# Altium PCB PcbDoc.pcbdoc
Units mil, origin at the board's own origin, x right, y up, seen from the top; angles counter-clockwise.
Board outline 5010.35 x 5043.03 mil, 2 copper layers (Top Layer, Bottom Layer); 34 components, 69 nets, 194 pads, 39 vias.
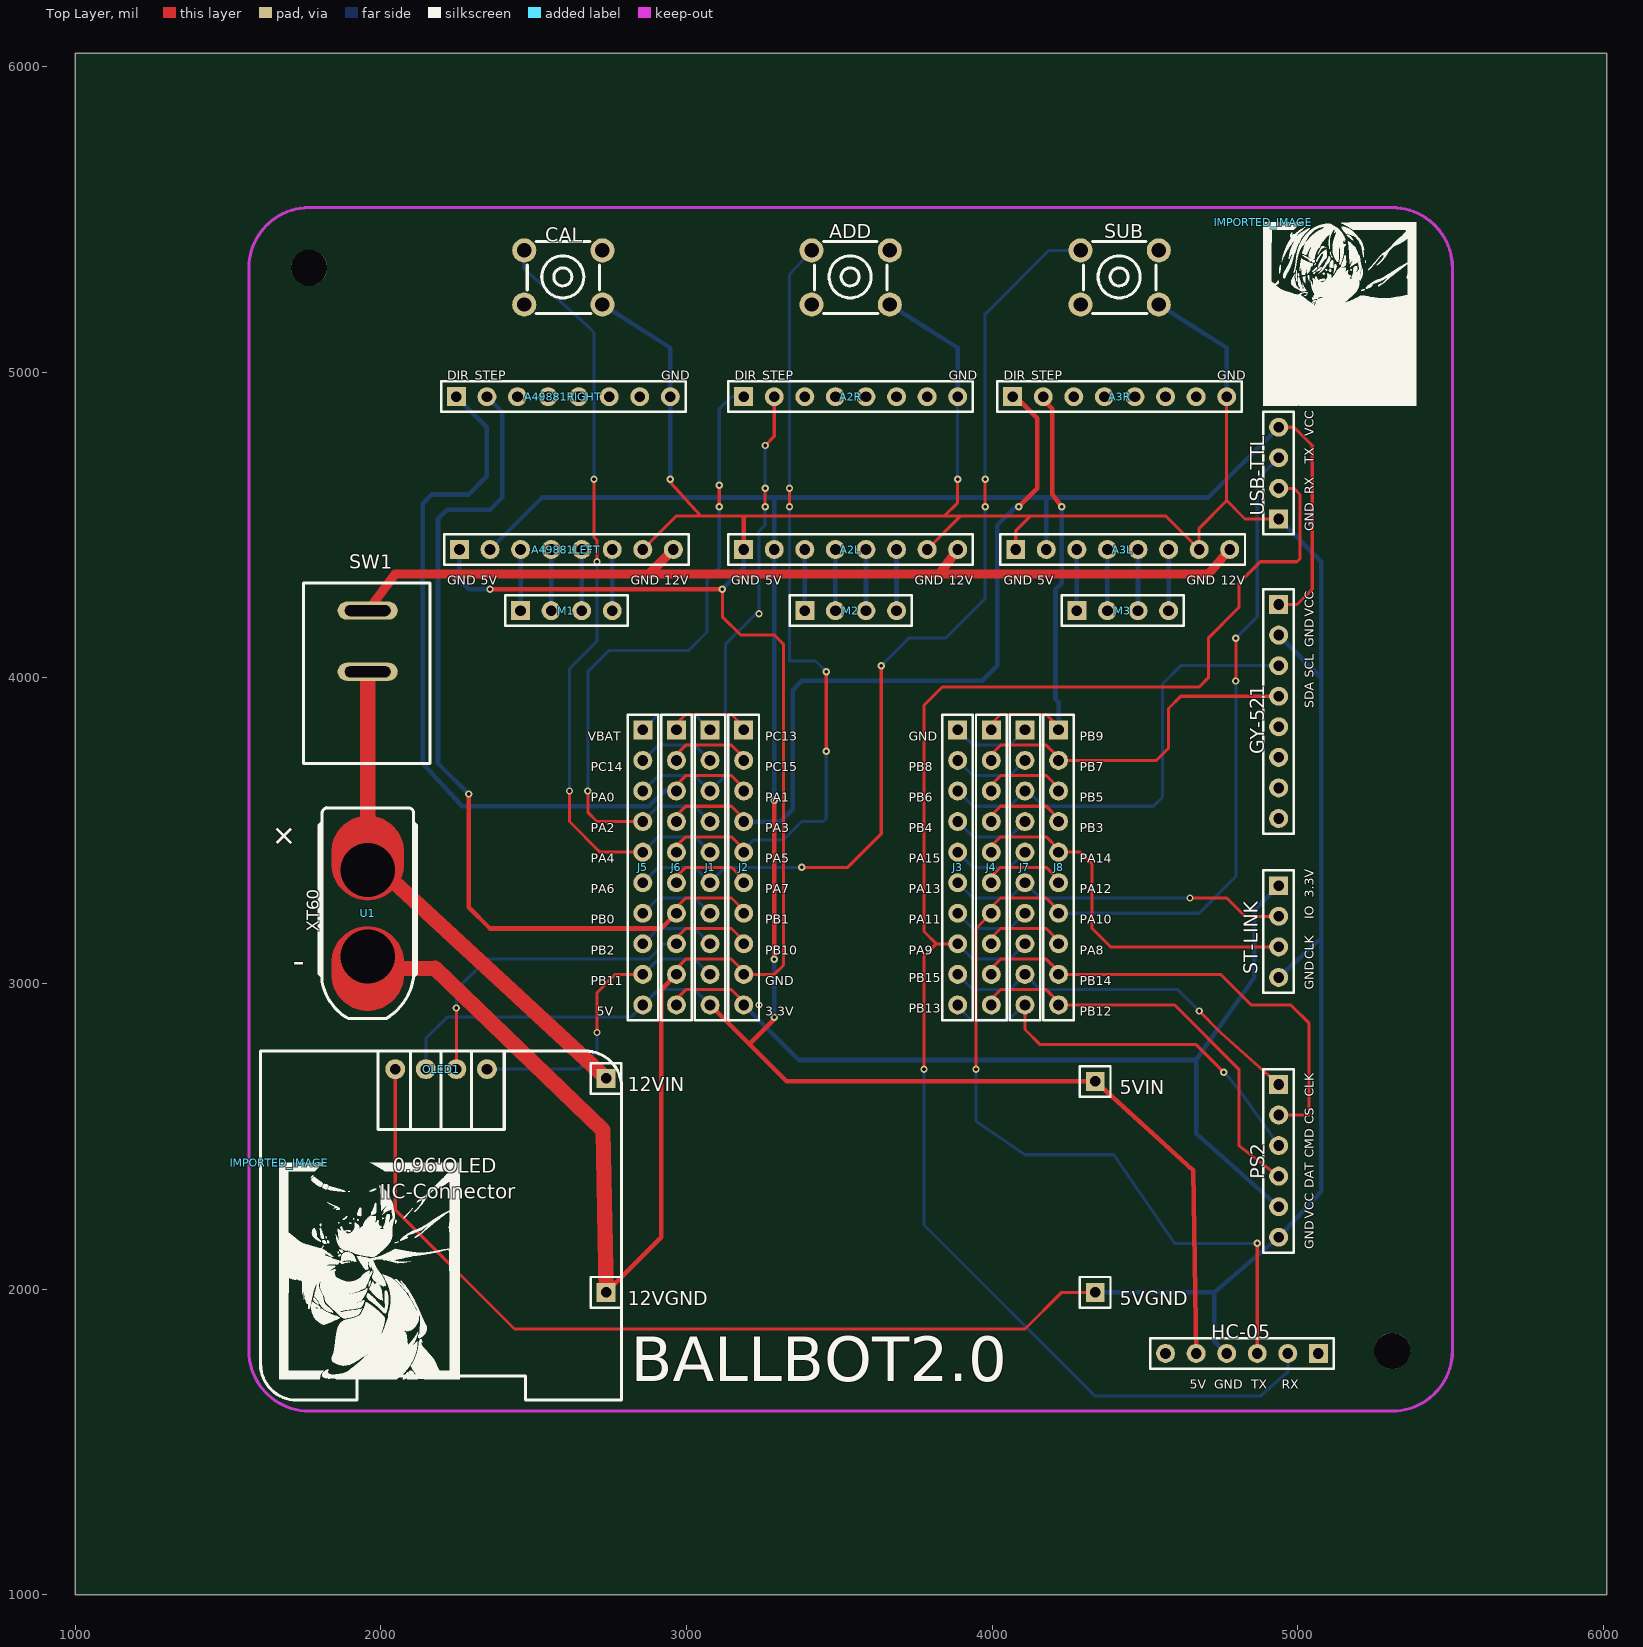
[diagram p0: Top Layer view]
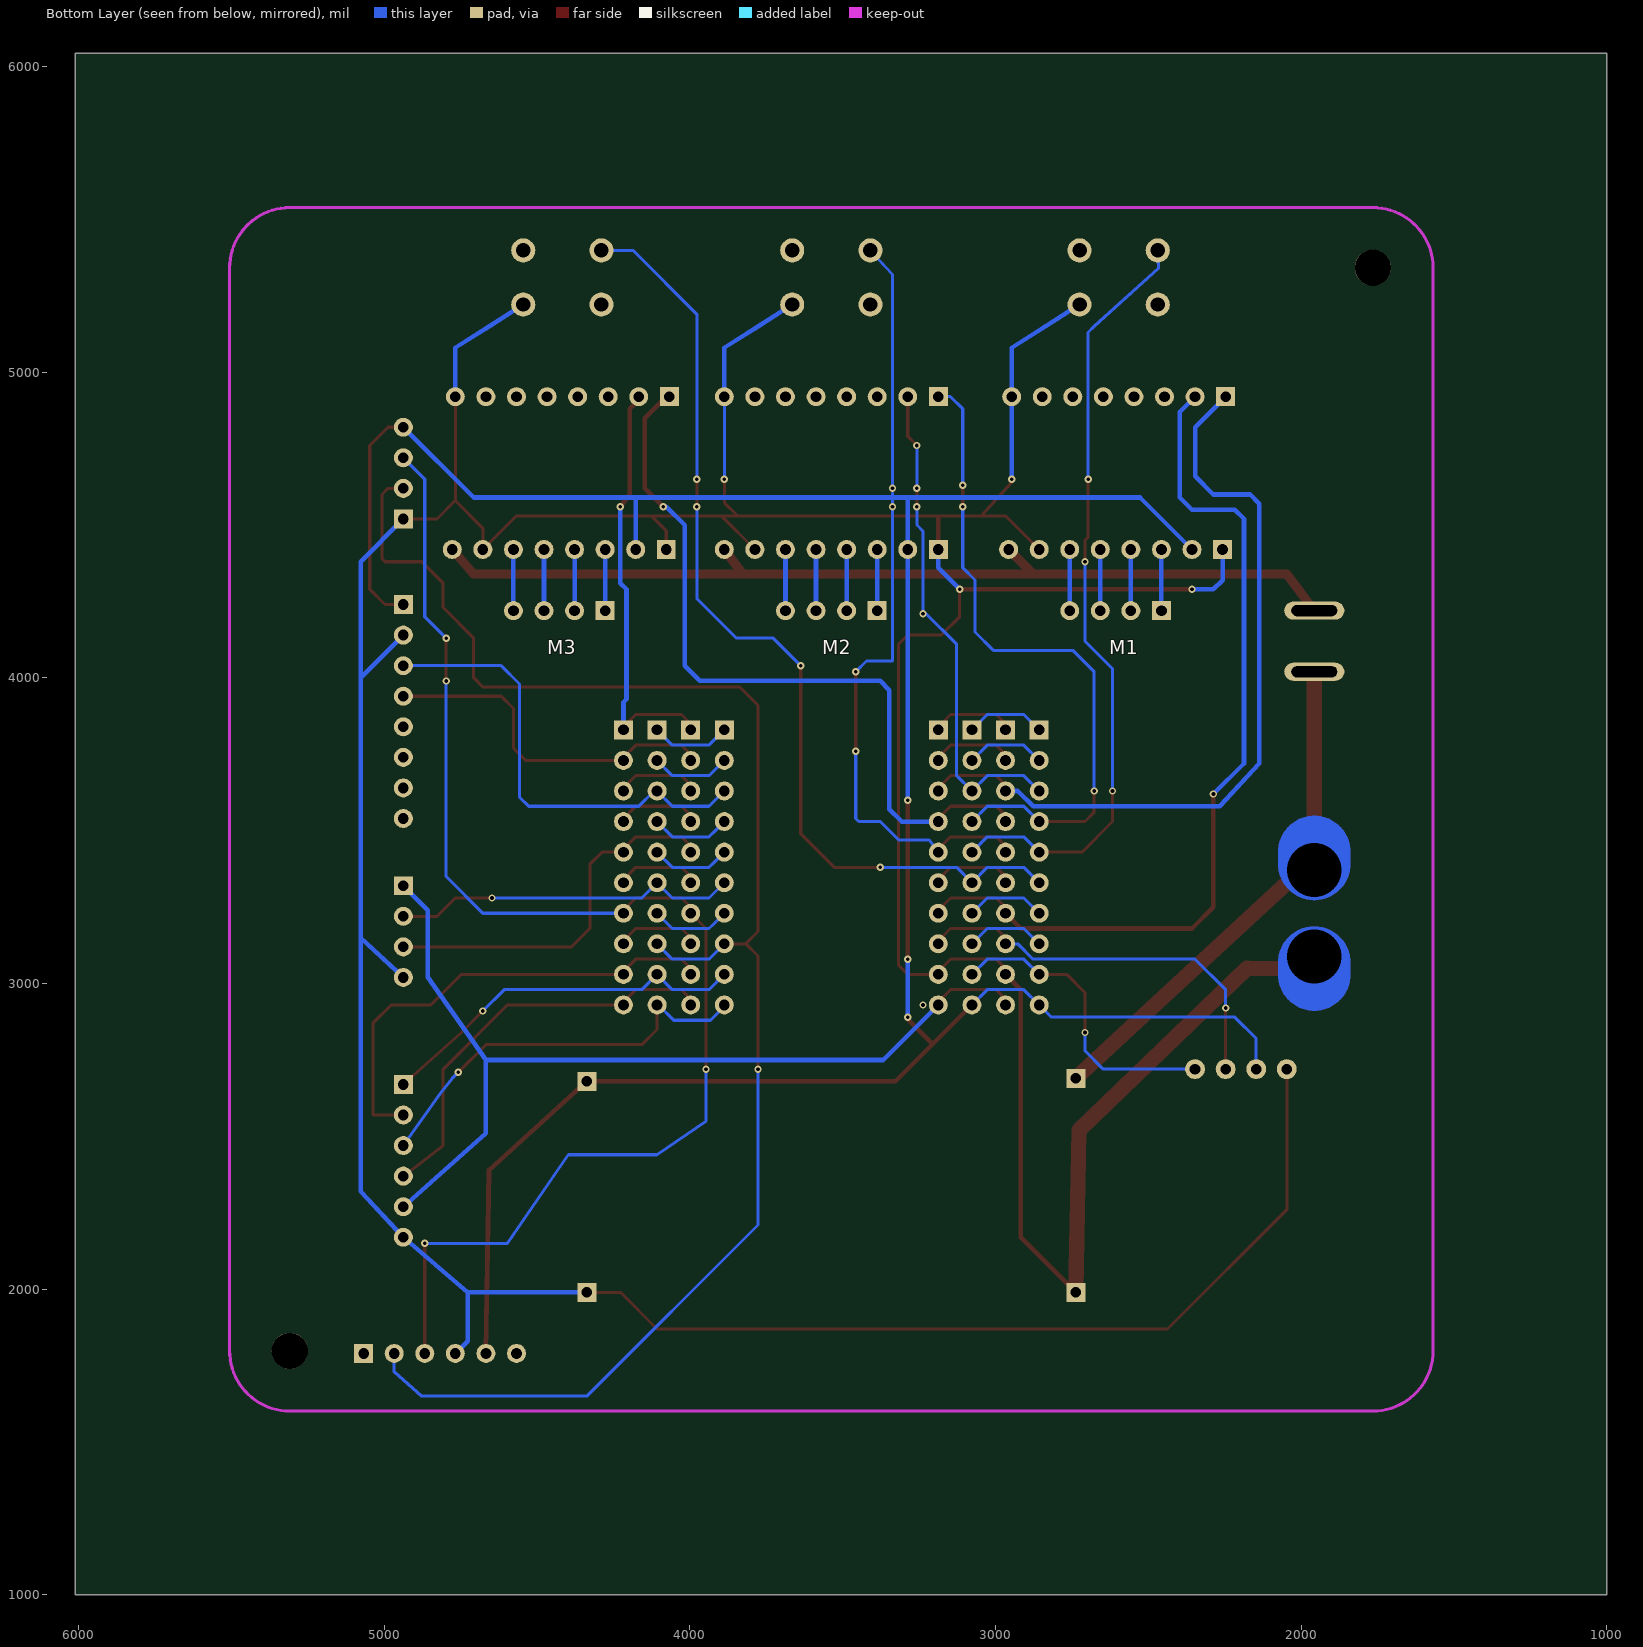
[diagram p1: Bottom Layer view, seen from below]

## Layer stack, top to bottom
Top Layer: signal copper (thickness not stored)
Dielectric: dielectric 12.6, FR-4, Dk 4.8
Bottom Layer: signal copper (thickness not stored)

## Board outline
6010.35,1000 1000,1000 1000,6043.03 6010.35,6043.03

## Components (designator, comment, footprint, x,y, rotation, side; value= is the part's Value field where it differs from the comment)
5VGND "HDR-M-2.54_1x1" HDR-M-2.54_1X1 4336.85,1989.53 r0 top
5VIN "HDR-M-2.54_1x1" HDR-M-2.54_1X1 4336.85,2679.53 r0 top
12VGND "HDR-M-2.54_1x1" HDR-M-2.54_1X1 2736.85,1989.53 r0 top
12VIN "HDR-M-2.54_1x1" HDR-M-2.54_1X1 2736.85,2689.53 r0 top
A2L "HDR-M-2.54_1x8" HDR-M-2.54_1X8 3586.85,4419.53 r0 top
A2R "HDR-M-2.54_1x8" HDR-M-2.54_1X8 3586.85,4919.53 r0 top
A3L "HDR-M-2.54_1x8" HDR-M-2.54_1X8 4476.85,4419.53 r0 top
A3R "HDR-M-2.54_1x8" HDR-M-2.54_1X8 4466.85,4919.53 r0 top
A49881LEFT "HDR-M-2.54_1x8" HDR-M-2.54_1X8 2656.85,4419.53 r0 top
A49881RIGHT "HDR-M-2.54_1x8" HDR-M-2.54_1X8 2646.85,4919.53 r0 top
ADD "KEY-6*6*9.5" KEY-TH_4P-L6.0-W6.0-P4.50-LS7.5 3536.85,5309.53 r0 top
CAL "KEY-6*6*9.5" KEY-TH_4P-L6.0-W6.0-P4.50-LS7.5 2596.85,5309.53 r0 top
GY-521 "HDR-M-2.54_1x8" HDR-M-2.54_1X8 4936.85,3839.53 r270 top
HC-05 "HDR-M-2.54_1x6" HDR-M-2.54_1X6 4816.85,1789.53 r180 top
IMPORTED_IMAGE "IMPORTED_IMAGE" IMPORTED_IMAGE 4886.85,5489.53 r0 top
IMPORTED_IMAGE "IMPORTED_IMAGE" IMPORTED_IMAGE 1666.85,2413.86 r0 top
J1 "HDR-M-2.54_1x10" HDR-M-2.54_1X10 3076.85,3379.53 r270 top
J2 "HDR-M-2.54_1x10" HDR-M-2.54_1X10 3186.85,3379.53 r270 top
J3 "HDR-M-2.54_1x10" HDR-M-2.54_1X10 3886.85,3379.53 r270 top
J4 "HDR-M-2.54_1x10" HDR-M-2.54_1X10 3996.85,3379.53 r270 top
J5 "HDR-M-2.54_1x10" HDR-M-2.54_1X10 2856.85,3379.53 r270 top
J6 "HDR-M-2.54_1x10" HDR-M-2.54_1X10 2966.85,3379.53 r270 top
J7 "HDR-M-2.54_1x10" HDR-M-2.54_1X10 4106.85,3379.53 r270 top
J8 "HDR-M-2.54_1x10" HDR-M-2.54_1X10 4216.85,3379.53 r270 top
M1 "HDR-M-2.54_1x4" HDR-M-2.54_1X4 2606.85,4219.53 r0 top
M2 "HDR-M-2.54_1x4" HDR-M-2.54_1X4 3536.85,4219.53 r0 top
M3 "HDR-M-2.54_1x4" HDR-M-2.54_1X4 4426.85,4219.53 r0 top
OLED1 "0.96OLED_4P" 0.96OLED_4P 2196.85,2719.53 r0 top
PS2 "HDR-M-2.54_1x6" HDR-M-2.54_1X6 4936.85,2419.53 r270 top
ST-LINK "HDR-M-2.54_1x4" HDR-M-2.54_1X4 4936.85,3169.53 r270 top
SUB "KEY-6*6*9.5" KEY-TH_4P-L6.0-W6.0-P4.50-LS7.5 4416.85,5309.53 r0 top
SW1 "小型 船型/形开关 KCD11 2档2脚 2档3脚 15*10mm 翘板开关" "小型 船型/形开关 KCD11 2档2脚 2档3脚 15*10MM 翘板开关" 1956.85,4219.53 r0 top
U1 "XT60" XT60 1956.85,3229.53 r270 top
USB-TTL "HDR-M-2.54_1x4" HDR-M-2.54_1X4 4936.85,4669.53 r90 top

## Footprints (in the part's own frame and the unit in brackets; to place one, negate y for a bottom-side part, rotate by r counter-clockwise, add the part's x,y. Pads: shape width x height; smd on the part's side, far side on the other; paste and mask are expansions set on the pad)
0.96OLED_4P [mm]
  round 1.65 hole 0.89: 1(-3.81,-0.001) 2(-1.27,0.002) 3(1.27,0.002) 4(3.81,0.002)
  silkscreen extent -15,-27.5 15,1.5
HDR-M-2.54_1X1 [mil]
  rect 62x62 hole 35: 1(0,0)
  silkscreen extent -50,-50 50,50
HDR-M-2.54_1X4 [mil]
  rect 62x62 hole 35: 1(-150,0)
  round 62 hole 35: 2(-50,0) 3(50,0) 4(150,0)
  silkscreen extent -200,-50 200,50
HDR-M-2.54_1X6 [mil]
  rect 62x62 hole 35: 1(-250,0)
  round 62 hole 35: 2(-150,0) 3(-50,0) 4(50,0) 5(150,0) 6(250,0)
  silkscreen extent -300,-50 300,50
HDR-M-2.54_1X8 [mil]
  rect 62x62 hole 35: 1(-400,0)
  round 62 hole 35: 2(-300,0) 3(-200,0) 4(-100,0) 5(0,0) 6(100,0) 7(200,0) 8(300,0)
  silkscreen extent -450,-50 350,50
HDR-M-2.54_1X10 [mil]
  rect 62x62 hole 35: 1(-450,0)
  round 62 hole 35: 2(-350,0) 3(-250,0) 4(-150,0) 5(-50,0) 6(50,0) 7(150,0) 8(250,0) 9(350,0) 10(450,0)
  silkscreen extent -500,-50 500,50
IMPORTED_IMAGE [mil]
  silkscreen extent 0,-600 500,0
KEY-TH_4P-L6.0-W6.0-P4.50-LS7.5 [mm]
  round 2 hole 1.2: 1(-3.25,-2.25) 2(3.25,-2.25) 3(3.25,2.25) 4(-3.25,2.25)
  silkscreen extent -3,-3 3,3
XT60 [mm]
  round 0 hole 4.5: 1(-3.6,0) 2(3.6,0)
  Top Layer region: -1.101,-0.075 -1.108,-0.224 -1.123,-0.373 -1.146,-0.521 -1.175,-0.668 -1.212,-0.813 -1.256,-0.955 -1.307,-1.096 -1.366,-1.234 -1.43,-1.369 -1.502,-1.5 -1.58,-1.628 -1.664,-1.751 -1.755,-1.87 -1.851,-1.985 -1.952,-2.095 -2.06,-2.199 -2.172,-2.298 -2.289,-2.391 -2.41,-2.479 -2.536,-2.56 -2.665,-2.635 -2.798,-2.703 -2.935,-2.764 -3.074,-2.819 -3.216,-2.867 -3.36,-2.907 -3.506,-2.941 -3.653,-2.966 -3.801,-2.985 -3.951,-2.996 -4.1,-3 -5.1,-3 -5.25,-2.996 -5.399,-2.985 -5.547,-2.966 -5.695,-2.941 -5.84,-2.907 -5.984,-2.867 -6.126,-2.819 -6.265,-2.764 -6.402,-2.703 -6.535,-2.635 -6.664,-2.56 -6.79,-2.479 -6.911,-2.391 -7.028,-2.298 -7.141,-2.199 -7.248,-2.095 -7.349,-1.985 -7.446,-1.87 -7.536,-1.751 -7.62,-1.628 -7.698,-1.5 -7.77,-1.369 -7.835,-1.234 -7.893,-1.096 -7.944,-0.955 -7.988,-0.813 -8.025,-0.668 -8.054,-0.521 -8.077,-0.373 -8.092,-0.224 -8.099,-0.075 -8.099,0.075 -8.092,0.224 -8.077,0.373 -8.054,0.521 -8.025,0.668 -7.988,0.813 -7.944,0.955 -7.893,1.096 -7.835,1.234 -7.77,1.369 -7.698,1.5 -7.62,1.628 -7.536,1.751 -7.446,1.87 -7.349,1.985 -7.248,2.095 -7.141,2.199 -7.028,2.298 -6.911,2.391 -6.79,2.479 -6.664,2.56 -6.535,2.635 -6.402,2.703 -6.265,2.764 -6.126,2.819 -5.984,2.867 -5.84,2.907 -5.695,2.941 -5.547,2.966 -5.399,2.985 -5.25,2.996 -5.1,3 -4.1,3 -3.951,2.996 -3.801,2.985 -3.653,2.966 -3.506,2.941 -3.36,2.907 -3.216,2.867 -3.074,2.819 -2.935,2.764 -2.798,2.703 -2.665,2.635 -2.536,2.56 -2.41,2.479 -2.289,2.391 -2.172,2.298 -2.06,2.199 -1.952,2.095 -1.851,1.985 -1.755,1.87 -1.664,1.751 -1.58,1.628 -1.502,1.5 -1.43,1.369 -1.366,1.234 -1.307,1.096 -1.256,0.955 -1.212,0.813 -1.175,0.668 -1.146,0.521 -1.123,0.373 -1.108,0.224 -1.101,0.075
  Top Layer region: 8.099,-0.075 8.092,-0.224 8.077,-0.373 8.054,-0.521 8.025,-0.668 7.988,-0.813 7.944,-0.955 7.893,-1.096 7.834,-1.234 7.77,-1.369 7.698,-1.5 7.62,-1.628 7.536,-1.751 7.445,-1.87 7.349,-1.985 7.248,-2.095 7.14,-2.199 7.028,-2.298 6.911,-2.391 6.79,-2.479 6.664,-2.56 6.535,-2.635 6.402,-2.703 6.265,-2.764 6.126,-2.819 5.984,-2.867 5.84,-2.907 5.694,-2.941 5.547,-2.966 5.399,-2.985 5.249,-2.996 5.1,-3 4.1,-3 3.95,-2.996 3.801,-2.985 3.653,-2.966 3.506,-2.941 3.36,-2.907 3.216,-2.867 3.074,-2.819 2.935,-2.764 2.798,-2.703 2.665,-2.635 2.536,-2.56 2.41,-2.479 2.289,-2.391 2.172,-2.298 2.059,-2.199 1.952,-2.095 1.851,-1.985 1.754,-1.87 1.664,-1.751 1.58,-1.628 1.502,-1.5 1.43,-1.369 1.365,-1.234 1.307,-1.096 1.256,-0.955 1.212,-0.813 1.175,-0.668 1.146,-0.521 1.123,-0.373 1.108,-0.224 1.101,-0.075 1.101,0.075 1.108,0.224 1.123,0.373 1.146,0.521 1.175,0.668 1.212,0.813 1.256,0.955 1.307,1.096 1.365,1.234 1.43,1.369 1.502,1.5 1.58,1.628 1.664,1.751 1.754,1.87 1.851,1.985 1.952,2.095 2.059,2.199 2.172,2.298 2.289,2.391 2.41,2.479 2.536,2.56 2.665,2.635 2.798,2.703 2.935,2.764 3.074,2.819 3.216,2.867 3.36,2.907 3.506,2.941 3.653,2.966 3.801,2.985 3.95,2.996 4.1,3 5.1,3 5.249,2.996 5.399,2.985 5.547,2.966 5.694,2.941 5.84,2.907 5.984,2.867 6.126,2.819 6.265,2.764 6.402,2.703 6.535,2.635 6.664,2.56 6.79,2.479 6.911,2.391 7.028,2.298 7.14,2.199 7.248,2.095 7.349,1.985 7.445,1.87 7.536,1.751 7.62,1.628 7.698,1.5 7.77,1.369 7.834,1.234 7.893,1.096 7.944,0.955 7.988,0.813 8.025,0.668 8.054,0.521 8.077,0.373 8.092,0.224 8.099,0.075
  Bottom Layer region: -1.101,-0.075 -1.108,-0.224 -1.123,-0.373 -1.146,-0.521 -1.175,-0.668 -1.212,-0.813 -1.256,-0.955 -1.307,-1.096 -1.366,-1.234 -1.43,-1.369 -1.502,-1.5 -1.58,-1.628 -1.664,-1.751 -1.755,-1.87 -1.851,-1.985 -1.952,-2.095 -2.06,-2.199 -2.172,-2.298 -2.289,-2.391 -2.41,-2.479 -2.536,-2.56 -2.665,-2.635 -2.798,-2.703 -2.935,-2.764 -3.074,-2.819 -3.216,-2.867 -3.36,-2.907 -3.506,-2.941 -3.653,-2.966 -3.801,-2.985 -3.951,-2.996 -4.1,-3 -5.1,-3 -5.25,-2.996 -5.399,-2.985 -5.547,-2.966 -5.695,-2.941 -5.84,-2.907 -5.984,-2.867 -6.126,-2.819 -6.265,-2.764 -6.402,-2.703 -6.535,-2.635 -6.664,-2.56 -6.79,-2.479 -6.911,-2.391 -7.028,-2.298 -7.141,-2.199 -7.248,-2.095 -7.349,-1.985 -7.446,-1.87 -7.536,-1.751 -7.62,-1.628 -7.698,-1.5 -7.77,-1.369 -7.835,-1.234 -7.893,-1.096 -7.944,-0.955 -7.988,-0.813 -8.025,-0.668 -8.054,-0.521 -8.077,-0.373 -8.092,-0.224 -8.099,-0.075 -8.099,0.075 -8.092,0.224 -8.077,0.373 -8.054,0.521 -8.025,0.668 -7.988,0.813 -7.944,0.955 -7.893,1.096 -7.835,1.234 -7.77,1.369 -7.698,1.5 -7.62,1.628 -7.536,1.751 -7.446,1.87 -7.349,1.985 -7.248,2.095 -7.141,2.199 -7.028,2.298 -6.911,2.391 -6.79,2.479 -6.664,2.56 -6.535,2.635 -6.402,2.703 -6.265,2.764 -6.126,2.819 -5.984,2.867 -5.84,2.907 -5.695,2.941 -5.547,2.966 -5.399,2.985 -5.25,2.996 -5.1,3 -4.1,3 -3.951,2.996 -3.801,2.985 -3.653,2.966 -3.506,2.941 -3.36,2.907 -3.216,2.867 -3.074,2.819 -2.935,2.764 -2.798,2.703 -2.665,2.635 -2.536,2.56 -2.41,2.479 -2.289,2.391 -2.172,2.298 -2.06,2.199 -1.952,2.095 -1.851,1.985 -1.755,1.87 -1.664,1.751 -1.58,1.628 -1.502,1.5 -1.43,1.369 -1.366,1.234 -1.307,1.096 -1.256,0.955 -1.212,0.813 -1.175,0.668 -1.146,0.521 -1.123,0.373 -1.108,0.224 -1.101,0.075
  Bottom Layer region: 8.099,-0.075 8.092,-0.224 8.077,-0.373 8.054,-0.521 8.025,-0.668 7.988,-0.813 7.944,-0.955 7.893,-1.096 7.834,-1.234 7.77,-1.369 7.698,-1.5 7.62,-1.628 7.536,-1.751 7.445,-1.87 7.349,-1.985 7.248,-2.095 7.14,-2.199 7.028,-2.298 6.911,-2.391 6.79,-2.479 6.664,-2.56 6.535,-2.635 6.402,-2.703 6.265,-2.764 6.126,-2.819 5.984,-2.867 5.84,-2.907 5.694,-2.941 5.547,-2.966 5.399,-2.985 5.249,-2.996 5.1,-3 4.1,-3 3.95,-2.996 3.801,-2.985 3.653,-2.966 3.506,-2.941 3.36,-2.907 3.216,-2.867 3.074,-2.819 2.935,-2.764 2.798,-2.703 2.665,-2.635 2.536,-2.56 2.41,-2.479 2.289,-2.391 2.172,-2.298 2.059,-2.199 1.952,-2.095 1.851,-1.985 1.754,-1.87 1.664,-1.751 1.58,-1.628 1.502,-1.5 1.43,-1.369 1.365,-1.234 1.307,-1.096 1.256,-0.955 1.212,-0.813 1.175,-0.668 1.146,-0.521 1.123,-0.373 1.108,-0.224 1.101,-0.075 1.101,0.075 1.108,0.224 1.123,0.373 1.146,0.521 1.175,0.668 1.212,0.813 1.256,0.955 1.307,1.096 1.365,1.234 1.43,1.369 1.502,1.5 1.58,1.628 1.664,1.751 1.754,1.87 1.851,1.985 1.952,2.095 2.059,2.199 2.172,2.298 2.289,2.391 2.41,2.479 2.536,2.56 2.665,2.635 2.798,2.703 2.935,2.764 3.074,2.819 3.216,2.867 3.36,2.907 3.506,2.941 3.653,2.966 3.801,2.985 3.95,2.996 4.1,3 5.1,3 5.249,2.996 5.399,2.985 5.547,2.966 5.694,2.941 5.84,2.907 5.984,2.867 6.126,2.819 6.265,2.764 6.402,2.703 6.535,2.635 6.664,2.56 6.79,2.479 6.911,2.391 7.028,2.298 7.14,2.199 7.248,2.095 7.349,1.985 7.445,1.87 7.536,1.751 7.62,1.628 7.698,1.5 7.77,1.369 7.834,1.234 7.893,1.096 7.944,0.955 7.988,0.813 8.025,0.668 8.054,0.521 8.077,0.373 8.092,0.224 8.099,0.075
  silkscreen extent -8.77,-4.06 8.76,4.06
"小型 船型/形开关 KCD11 2档2脚 2档3脚 15*10MM 翘板开关" [mm]
  oval 5x1.5 hole 0.9 slot 3.8 at 0 deg: 1(0,0) 2(0,-5.08)
  silkscreen extent -5.33,-12.71 5.17,2.29

## Free pads (board coordinates)
  round 118.11 hole 118.11 unplated: ""(1765.2,5341.18) ""(5308.5,1797.88)

## Via types
v1: diameter 24, hole 12, Top Layer to Bottom Layer, 39 vias

## Nets (pads, with @x,y where several pads share a name; then routed paths per layer and width w, separated by ;. In a path a pad name is that pad's centre, name@x,y a point inside that pad or via, vN(x,y) a via of type N, cw(c..) or ccw(c..) an arc to the next point about the centre after c; other vN are vias at no path point)
0: HC-05.6
5V:  | length 7098.2
  Top Layer w10: 4936.85,4239.53 4996.85,4239.53 5046.85,4289.53 5046.85,4759.53 4986.85,4819.53 4936.85,4819.53
  Top Layer w15: 3076.85,2929.53 3326.85,2679.53 4336.85,2679.53 ; 3204.92,2801.46 3286.85,2883.39 v1(3286.85,2889.53) ; v1(3286.85,3079.53) v1(3286.85,3599.53)
  Bottom Layer w10: 2856.85,2929.53 2906.85,2979.53 2967.28,2979.53 3026.85,2979.53 3076.85,2929.53
  Bottom Layer w15: 2356.85,4419.53 2526.85,4589.53 4706.85,4589.53 4936.85,4819.53 ; v1(3286.85,2889.53) v1(3286.85,3079.53) ; v1(3286.85,3599.53) 3286.85,4419.53 3286.85,4589.53 ; 4176.85,4419.53 4176.85,4589.53
+5V: 5VIN.1 A2L.2 A3L.2 A49881LEFT.2 GY-521.1 HC-05.5 J1.10 J5.10 OLED1.2 USB-TTL.4 | length 1887.5
  Top Layer w15: 5VIN.1 4656.85,2389.53 HC-05.5
  Bottom Layer w10: OLED1.2 2146.85,2819.53 2216.85,2889.53 2816.85,2889.53 J5.10
+12V: 12VIN.1 A2L.8 A3L.8 A49881LEFT.8 SW1.1 SW1.2 U1.1 | length 4800.6
  Top Layer w30: SW1.1 2046.85,4339.53 2876.85,4339.53 ; A49881LEFT.8 2876.85,4339.53 ; A2L.8 3826.85,4339.53 ; A3L.8 4706.85,4339.53 3826.85,4339.53 ; 2876.85,4339.53 3826.85,4339.53
  Top Layer w50: SW1.2 1956.85,3410.64 2448.81,2955.82 12VIN.1
A2L_3: A2L.3 M2.1 | length 200
  Bottom Layer w15: M2.1 A2L.3
A2L_4: A2L.4 M2.2 | length 200
  Bottom Layer w15: M2.2 A2L.4
A2L_5: A2L.5 M2.3 | length 200
  Bottom Layer w15: M2.3 A2L.5
A2L_6: A2L.6 M2.4 | length 200
  Bottom Layer w15: M2.4 A2L.6
A3L_3: A3L.3 M3.1 | length 200
  Bottom Layer w15: M3.1 A3L.3
A3L_4: A3L.4 M3.2 | length 200
  Bottom Layer w15: M3.2 A3L.4
A3L_5: A3L.5 M3.3 | length 200
  Bottom Layer w15: M3.3 A3L.5
A3L_6: A3L.6 M3.4 | length 200
  Bottom Layer w15: M3.4 A3L.6
A49881LEFT_3: A49881LEFT.3 M1.1 | length 200
  Bottom Layer w15: M1.1 A49881LEFT.3
A49881LEFT_4: A49881LEFT.4 M1.2 | length 200
  Bottom Layer w15: M1.2 A49881LEFT.4
A49881LEFT_5: A49881LEFT.5 M1.3 | length 200
  Bottom Layer w15: M1.3 A49881LEFT.5
A49881LEFT_6: A49881LEFT.6 M1.4 | length 200
  Bottom Layer w15: M1.4 A49881LEFT.6
DIR1: A49881RIGHT.1 J2.3 J6.3 | length 2583.6
  Top Layer w10: J6.3@2956.85,3639.53 2996.85,3679.53 3146.85,3679.53 3186.85,3639.53 J2.3
  Bottom Layer w15: A49881RIGHT.1 2346.85,4819.53 2346.85,4659.53 2286.85,4599.53 2166.85,4599.53 2136.85,4569.53 2136.85,3719.53 2266.85,3579.53 2876.85,3579.53 2926.85,3629.53 J6.3
DIR2: A2R.1 J1.4 J5.4 | length 2200.8
  Top Layer w10: v1(2676.85,3629.53) 2676.85,3559.53 2706.85,3529.53 J5.4 ; v1(3106.85,4559.53) v1(3106.85,4629.53)
  Bottom Layer w10: v1(2676.85,3629.53) 2676.85,4019.53 2746.85,4089.53 3006.85,4089.53 3066.85,4149.53 3066.85,4319.53 3106.85,4359.53 v1(3106.85,4559.53) ; J5.4 2906.85,3579.53 2960.18,3579.53 3026.85,3579.53 J1.4 ; v1(3106.85,4629.53) 3106.85,4879.53 3146.85,4919.53 A2R.1
DIR3: A3R.1 J2.4 J6.4 | length 2521.5
  Top Layer w10: J6.4@2956.85,3539.53 2996.85,3579.53 3146.85,3579.53 3186.85,3539.53 J2.4
  Top Layer w15: A3R.1 4076.85,4919.53 4146.85,4849.53 4146.85,4619.53 v1(4086.85,4559.53)
  Bottom Layer w15: J2.4 3306.85,3529.53 3346.85,3569.53 3346.85,3959.53 3376.85,3989.53 3966.85,3989.53 4016.85,4039.53 4016.85,4499.53 4076.85,4559.53 v1(4086.85,4559.53)
GND: 5VGND.1 12VGND.1 A2L.1 A2L.7 A2R.8 A3L.1 A3L.7 A3R.8 A49881LEFT.1 A49881LEFT.7 A49881RIGHT.8 ADD.2 CAL.2 GY-521.2 HC-05.4 J2.9 J6.9 OLED1.1 PS2.6 ST-LINK.4 SUB.2 U1.2 USB-TTL.1 | length 17685.5
  Top Layer w10: OLED1.1 2046.85,2259.53 2436.85,1869.53 4106.85,1869.53 4226.85,1989.53 5VGND.1 ; A49881LEFT.7 2966.85,4529.53 3896.85,4529.53 ; v1(2946.85,4649.53) 2946.85,4639.53 3046.85,4529.53 3186.85,4529.53 ; J6.9@2956.85,3039.53 2996.85,3079.53 3099.86,3079.53 3102.86,3079.53 3146.85,3079.53 3186.85,3039.53 J2.9 3286.85,3029.53 3316.85,3059.53 3316.85,4109.53 3286.85,4139.53 3176.85,4139.53 3116.85,4199.53 v1(3116.85,4289.53) ; A2L.7 3896.85,4529.53 ; 3843.64,4529.53 3886.85,4572.74 v1(3886.85,4649.53) ; A3L.1 4076.85,4480.46 4125.92,4529.53 ; A3R.8 4766.85,4579.53 ; USB-TTL.1 4826.85,4519.53 4766.85,4579.53 ; 3896.85,4529.53 4566.85,4529.53 A3L.7 4676.85,4489.53 4766.85,4579.53
  Top Layer w15: v1(2356.85,4289.53) v1(3116.85,4289.53) ; 12VGND.1 2916.85,2169.53 2916.85,2979.53 J6.9 ; A2L.1@3186.85,4414.53 3186.85,4524.53
  Top Layer w50: 1956.85,3048.43 2176.85,3049.53 2726.85,2519.53 12VGND.1
  Bottom Layer w10: v1(3886.85,4649.53) A2R.8
  Bottom Layer w15: A49881LEFT.1 2256.85,4319.53 2286.85,4289.53 v1(2356.85,4289.53) ; CAL.2 2836.85,5149.53 2946.85,5079.53 A49881RIGHT.8 v1(2946.85,4649.53) ; v1(3116.85,4289.53) 3186.85,4359.53 A2L.1 ; ADD.2 3776.85,5149.53 3886.85,5079.53 A2R.8 ; 5VGND.1 4726.85,1989.53 ; SUB.2 4656.85,5149.53 4766.85,5079.53 A3R.8 ; HC-05.4 4726.85,1829.53 4726.85,1989.53 ; ST-LINK.4 5076.85,3149.53 5076.85,2409.53 5076.85,2319.53 PS2.6 4726.85,1989.53 ; GY-521.2 5076.85,3999.53 ; USB-TTL.1 5076.85,4379.53 5076.85,3999.53 ; 5076.85,3019.53 5076.85,3999.53
J1_1: J1.1 J5.1 | length 261.4
  Bottom Layer w10: J5.1 2906.85,3879.53 3026.85,3879.53 J1.1
J1_2: J1.2 J5.2 | length 261.4
  Bottom Layer w10: J5.2 2906.85,3779.53 2956.27,3779.53 3026.85,3779.53 J1.2
J1_3:  | length 261.4
  Bottom Layer w10: 2856.85,3629.53 2906.85,3679.53 2959.24,3679.53 3026.85,3679.53 3076.85,3629.53
J1_5:  | length 261.4
  Bottom Layer w10: 2856.85,3429.53 2906.85,3479.53 2967.23,3479.53 3026.85,3479.53 3076.85,3429.53
J1_6:  | length 261.4
  Bottom Layer w10: 2856.85,3329.53 2906.85,3379.53 2970.8,3379.53 3026.85,3379.53 3076.85,3329.53
J1_7: J1.7 J5.7 | length 261.4
  Bottom Layer w10: J5.7 2906.85,3279.53 2972.09,3279.53 3026.85,3279.53 J1.7
J1_8: J1.8 J5.8 | length 261.4
  Bottom Layer w10: J5.8 2906.85,3179.53 2972.26,3179.53 3026.85,3179.53 J1.8
J1_9:  | length 261.4
  Bottom Layer w10: 2856.85,3029.53 2906.85,3079.53 2967.53,3079.53 3026.85,3079.53 3076.85,3029.53
J2_1: J2.1 J6.1 | length 273.1
  Top Layer w10: J6.1@2956.85,3839.53 2996.85,3879.53 3021.69,3879.53 3146.85,3879.53 3186.85,3839.53 J2.1
J2_2: J2.2 J6.2 | length 273.1
  Top Layer w10: J6.2@2956.85,3739.53 2996.85,3779.53 3101.69,3779.53 3146.85,3779.53 3186.85,3739.53 J2.2
J2_5:  | length 273.1
  Top Layer w10: 2956.85,3439.53 2996.85,3479.53 3095.09,3479.53 3146.85,3479.53 3186.85,3439.53 3186.85,3429.53
J2_6: J2.6 J6.6 | length 273.1
  Top Layer w10: J6.6@2956.85,3339.53 2996.85,3379.53 3146.85,3379.53 3186.85,3339.53 J2.6
J2_8:  | length 273.1
  Top Layer w10: 2956.85,3139.53 2996.85,3179.53 3062.28,3179.53 3146.85,3179.53 3186.85,3139.53 3186.85,3129.53
J3_1: J3.1 J7.1 | length 261.4
  Bottom Layer w10: J3.1 3929.53,3786.85 3936.85,3779.53 3989.67,3779.53 3998.9,3779.53 4056.85,3779.53 J7.1
J3_4: J3.4 J7.4 | length 261.4
  Bottom Layer w10: J3.4 3917.08,3499.29 3936.85,3479.53 3989.67,3479.53 3998.9,3479.53 4056.85,3479.53 J7.4
J3_5: J3.5 J7.5 | length 261.4
  Bottom Layer w10: J3.5 3919.66,3396.71 3936.85,3379.53 3989.67,3379.53 3998.9,3379.53 4056.85,3379.53 J7.5
J3_7: J3.7 J7.7 | length 261.4
  Bottom Layer w10: J3.7 3922.47,3193.9 3936.85,3179.53 3989.67,3179.53 3998.9,3179.53 4056.85,3179.53 J7.7
J4_3: J4.3 J8.3 | length 273.1
  Top Layer w10: J4.3@3986.85,3639.53 4026.85,3679.53 4176.85,3679.53 4181.28,3675.1 4216.85,3639.53 J8.3
J4_4: J4.4 J8.4 | length 273.1
  Top Layer w10: J4.4@3986.85,3539.53 4026.85,3579.53 4135.81,3579.53 4176.85,3579.53 4216.85,3539.53 J8.4
J4_6: J4.6 J8.6 | length 273.1
  Top Layer w10: J4.6@3986.85,3339.53 4026.85,3379.53 4113.18,3379.53 4176.85,3379.53 4216.85,3339.53 J8.6
J4_8: J4.8 J8.8 | length 273.1
  Top Layer w10: J4.8@3986.85,3139.53 4026.85,3179.53 4089.03,3179.53 4111.58,3179.53 4176.85,3179.53 4216.85,3139.53 J8.8
KEY1: CAL.4 J1.5 J5.5 | length 2292.9
  Top Layer w10: v1(2616.85,3629.53) 2616.85,3529.53 2716.85,3429.53 J5.5 ; v1(2696.85,4649.53) 2696.85,4459.53 2706.85,4449.53 v1(2706.85,4379.53)
  Bottom Layer w10: CAL.4 2466.85,5339.53 2676.85,5149.53 2696.85,5129.53 v1(2696.85,4649.53) ; v1(2616.85,3629.53) 2616.85,4029.53 2706.85,4119.53 v1(2706.85,4379.53)
KEY1_1: CAL.1
KEY1_3: CAL.3
KEY2: ADD.4 J2.5 J6.5 | length 2350.1
  Top Layer w10: v1(3336.85,4559.53) v1(3336.85,4619.53) ; v1(3456.85,3759.53) v1(3456.85,4019.53)
  Bottom Layer w10: J2.5 3216.85,3469.53 3316.85,3469.53 3376.85,3529.53 3446.85,3529.53 3456.85,3539.53 v1(3456.85,3759.53) ; 3336.85,4604.53 3336.85,4054.53 3421.85,4054.53 v1(3456.85,4019.53) ; v1(3336.85,4619.53) 3336.85,5319.53 ADD.4
KEY2_1: ADD.1
KEY2_3: ADD.3
KEY3: J1.6 J5.6 SUB.4 | length 2935.8
  Top Layer w10: v1(3376.85,3379.53) 3526.85,3379.53 3636.85,3489.53 v1(3636.85,4039.53) ; v1(3976.85,4559.53) v1(3976.85,4649.53)
  Bottom Layer w10: J1.6 3126.85,3379.53 v1(3376.85,3379.53) ; v1(3636.85,4039.53) 3726.85,4129.53 3846.85,4129.53 3976.85,4259.53 v1(3976.85,4559.53) ; v1(3976.85,4649.53) 3976.85,5189.53 4185.43,5398.11 SUB.4
KEY3_1: SUB.1
KEY3_3: SUB.3
PA13: J3.6 J7.6 ST-LINK.2 | length 1137
  Top Layer w10: v1(4646.85,3279.53) 4766.85,3279.53 4826.85,3219.53 ST-LINK.2
  Bottom Layer w10: J3.6 3923.75,3292.63 3936.85,3279.53 3989.67,3279.53 3998.9,3279.53 4056.85,3279.53 J7.6 4156.85,3279.53 v1(4646.85,3279.53)
PA14: J4.5 J8.5 ST-LINK.3 | length 1244.6
  Top Layer w10: J4.5@3986.85,3439.53 4026.85,3479.53 4124.98,3479.53 4176.85,3479.53 4216.85,3439.53 J8.5 4286.85,3429.53 4326.85,3389.53 4326.85,3179.53 4386.85,3119.53 ST-LINK.3
PB8: J3.2 J7.2
PB10: J2.8 J6.8 OLED1.3 | length 1042.1
  Top Layer w10: OLED1.3 v1(2246.85,2919.53)
  Bottom Layer w10: v1(2246.85,2919.53) 2246.85,2979.53 2346.85,3079.53 2876.85,3079.53 2926.85,3129.53 J6.8
PB11: J1.9 J5.9 OLED1.4 | length 749.7
  Top Layer w10: v1(2706.85,2839.53) 2706.85,2969.53 2766.85,3029.53 J5.9
  Bottom Layer w10: OLED1.4 2646.85,2719.53 2706.85,2779.53 v1(2706.85,2839.53)
PB12: J4.10 J8.10 PS2.4 | length 1364.1
  Top Layer w10: J4.10@3986.85,2939.53 4026.85,2979.53 4096.64,2979.53 4176.85,2979.53 4216.85,2939.53 J8.10 4596.85,2929.53 4806.85,2719.53 4806.85,2569.53 4806.85,2469.53 PS2.4
PB13: J3.10 J7.10 PS2.3 | length 1349.8
  Top Layer w10: J7.10 4106.85,2849.53 4156.85,2799.53 4666.85,2799.53 v1(4756.85,2709.53)
  Bottom Layer w10: J3.10@3882.53,2929.53 3925.09,2886.97 3932.53,2879.53 3985.36,2879.53 3994.59,2879.53 4052.53,2879.53 J7.10@4102.53,2929.53 ; v1(4756.85,2709.53) 4776.85,2689.53 4816.85,2639.53 PS2.3
PB14: J4.9 J8.9 PS2.2 | length 1559.4
  Top Layer w10: J4.9@3986.85,3039.53 4026.85,3079.53 4176.85,3079.53 4216.85,3039.53 J8.9 4746.85,3029.53 4846.85,2929.53 4976.85,2929.53 5036.85,2869.53 5036.85,2569.53 PS2.2
PB15: J3.9 J7.9 PS2.1 | length 1235.1
  Top Layer w10: v1(4676.85,2909.53) 4746.85,2839.53 PS2.1
  Bottom Layer w10: J3.9 3936.85,2979.53 3989.67,2979.53 3998.9,2979.53 4056.85,2979.53 J7.9 4156.85,2979.53 4606.85,2979.53 v1(4676.85,2909.53)
S$467: 
S$20497: 
SCL: GY-521.3 J3.3 J7.3 | length 1519.4
  Bottom Layer w10: J3.3 3921.29,3595.09 3936.85,3579.53 3989.67,3579.53 3998.9,3579.53 4056.85,3579.53 J7.3 4116.85,3629.53 4166.85,3579.53 4526.85,3579.53 4556.85,3609.53 4556.85,3979.53 4616.85,4039.53 GY-521.3
SDA: GY-521.4 J4.2 J8.2 | length 1156.3
  Top Layer w10: J4.2@3986.85,3739.53 4015.24,3767.92 4026.85,3779.53 4176.85,3779.53 4216.85,3739.53 J8.2 4536.85,3729.53 4576.85,3769.53 4576.85,3899.53 4616.85,3939.53 GY-521.4
STEP1: A49881RIGHT.2 J2.7 J6.7 | length 2904
  Top Layer w10: J6.7@2956.85,3239.53 2996.85,3279.53 3093.94,3279.53 3146.85,3279.53 3186.85,3239.53 J2.7
  Top Layer w15: v1(2286.85,3619.53) 2286.85,3249.53 2356.85,3179.53 2916.85,3179.53 J6.7
  Bottom Layer w15: v1(2286.85,3619.53) 2186.85,3719.53 2186.85,4519.53 2216.85,4549.53 2356.85,4549.53 2396.85,4589.53 2396.85,4869.53 A49881RIGHT.2
STEP2: A2R.2 J1.3 J5.3 | length 1644.3
  Top Layer w10: v1(3256.85,4559.53) v1(3256.85,4619.53) ; v1(3256.85,4759.53) 3286.85,4789.53 A2R.2
  Bottom Layer w10: J1.3 3126.85,3679.53 3126.85,4109.53 3226.85,4209.53 v1(3236.85,4209.53) 3236.85,4479.53 3256.85,4499.53 v1(3256.85,4559.53) ; v1(3256.85,4619.53) v1(3256.85,4759.53) ; 3886.85,3729.53 3920.03,3696.35 3936.85,3679.53 3989.67,3679.53 3998.9,3679.53 4056.85,3679.53 4106.85,3729.53
STEP3: A3R.2 J4.1 J8.1 | length 1398
  Top Layer w10: J4.1@3986.85,3839.53 4015.49,3868.17 4026.85,3879.53 4176.85,3879.53 4216.85,3839.53 J8.1
  Top Layer w15: A3R.2 4166.85,4909.53 4196.85,4879.53 4196.85,4599.53 v1(4226.85,4559.53)
  Bottom Layer w15: J8.1 4216.85,3919.53 4206.85,3929.53 4206.85,4289.53 4226.85,4309.53 v1(4226.85,4559.53)
U1RX: HC-05.3 J4.7 J8.7 USB-TTL.3 | length 4498
  Top Layer w10: v1(3946.85,2719.53) 3946.85,3179.53 J4.7 ; J4.7@3986.85,3239.53 4026.85,3279.53 4106.44,3279.53 4113.48,3279.53 4176.85,3279.53 4216.85,3239.53 J8.7 ; v1(4796.85,3989.53) v1(4796.85,4129.53) ; HC-05.3 v1(4866.85,2149.53)
  Bottom Layer w10: v1(3946.85,2719.53) 3946.85,2549.53 4106.85,2439.53 4396.85,2439.53 4596.85,2149.53 v1(4866.85,2149.53) ; J8.7 4676.85,3229.53 4796.85,3349.53 v1(4796.85,3989.53) ; v1(4796.85,4129.53) 4866.85,4199.53 4866.85,4649.53 USB-TTL.3
U1TX: HC-05.2 J3.8 J7.8 USB-TTL.2 | length 5417.1
  Top Layer w10: v1(3776.85,2719.53) 3776.85,3089.53 3816.85,3129.53 ; J3.8 3816.85,3129.53 ; USB-TTL.2 4986.85,4619.53 5006.85,4599.53 5006.85,4389.53 4996.85,4379.53 4876.85,4379.53 4806.85,4309.53 4806.85,4229.53 4706.85,4129.53 4706.85,3999.53 4676.85,3969.53 3836.85,3969.53 3776.85,3909.53 3776.85,3169.53 3816.85,3129.53
  Bottom Layer w10: v1(3776.85,2719.53) 3776.85,2209.53 4336.85,1649.53 4876.85,1649.53 4966.85,1729.53 HC-05.2 ; J3.8 3926.5,3089.87 3936.85,3079.53 3989.67,3079.53 3998.9,3079.53 4056.85,3079.53 J7.8
VCC_3.3V: J2.10 J6.10 PS2.5 ST-LINK.1 | length 3092.2
  Top Layer w10: J6.10@2956.85,2939.53 2996.85,2979.53 3104.36,2979.53 3146.85,2979.53 3186.85,2939.53 J2.10
  Bottom Layer w15: J2.10 3225.42,2890.96 3366.85,2749.53 4666.85,2749.53 ; PS2.5 4666.85,2509.53 4666.85,2749.53 ; ST-LINK.1 4856.85,3239.53 4856.85,3019.53 4666.85,2749.53
pads on no net: A2R.3 A2R.4 A2R.5 A2R.6 A2R.7 A3R.3 A3R.4 A3R.5 A3R.6 A3R.7 A49881RIGHT.3 A49881RIGHT.4 A49881RIGHT.5 A49881RIGHT.6 A49881RIGHT.7 GY-521.5 GY-521.6 GY-521.7 GY-521.8 HC-05.1
copper on no net:
  other v1: 3236.85,2929.53

## Keep-outs
Keep-Out Layer:
  lines w10: 1568.35,1797.87 ccw(c1765.19,1797.87) 1765.19,1601.02 ; 1568.35,5341.18 cw(c1765.19,5341.18) 1765.19,5538.03 ; 5308.5,1601.02 ccw(c5308.5,1797.87) 5505.35,1797.87 ; 5308.5,5538.03 cw(c5308.5,5341.18) 5505.35,5341.18

## Silkscreen, mask and mechanical layers (free items; w line width, h text height)
Top Overlay:
  text "DIR" at 2216.85,4974.53 h30
  text "STEP" at 2306.85,4974.53 h30
  text "GND" at 2916.85,4974.53 h30
  text "DIR" at 3156.85,4974.53 h30
  text "STEP" at 3246.85,4974.53 h30
  text "GND" at 3856.85,4974.53 h30
  text "DIR" at 4036.85,4974.53 h30
  text "STEP" at 4126.85,4974.53 h30
  text "GND" at 4736.85,4974.53 h30
  text "VCC" at 5051.85,4789.53 h30 r90
  text "TX" at 5051.85,4699.53 h30 r90
  text "RX" at 5051.85,4599.53 h30 r90
  text "GND" at 5051.85,4479.53 h30 r90
  text "GND" at 2216.85,4304.53 h30
  text "5V" at 2326.85,4304.53 h30
  text "GND" at 2816.85,4304.53 h30
  text "12V" at 2926.85,4304.53 h30
  text "GND" at 3146.85,4304.53 h30
  text "5V" at 3256.85,4304.53 h30
  text "GND" at 3746.85,4304.53 h30
  text "12V" at 3856.85,4304.53 h30
  text "GND" at 4036.85,4304.53 h30
  text "5V" at 4146.85,4304.53 h30
  text "GND" at 4636.85,4304.53 h30
  text "12V" at 4746.85,4304.53 h30
  text "VCC" at 5051.85,4199.53 h30 r90
  text "GND" at 5051.85,4099.53 h30 r90
  text "SCL" at 5051.85,3999.53 h30 r90
  text "SDA" at 5051.85,3899.53 h30 r90
  text "VBAT" at 2676.85,3794.53 h30
  text "PC13" at 3256.85,3794.53 h30
  text "GND" at 3726.85,3794.53 h30
  text "PB9" at 4286.85,3794.53 h30
  text "PC14" at 2686.85,3694.53 h30
  text "PC15" at 3256.85,3694.53 h30
  text "PB8" at 3726.85,3694.53 h30
  text "PB7" at 4286.85,3694.53 h30
  text "PA0" at 2686.85,3594.53 h30
  text "PA1" at 3256.85,3594.53 h30
  text "PB6" at 3726.85,3594.53 h30
  text "PB5" at 4286.85,3594.53 h30
  text "PA2" at 2686.85,3494.53 h30
  text "PA3" at 3256.85,3494.53 h30
  text "PB4" at 3726.85,3494.53 h30
  text "PB3" at 4286.85,3494.53 h30
  text "PA4" at 2686.85,3394.53 h30
  text "PA5" at 3256.85,3394.53 h30
  text "PA15" at 3726.85,3394.53 h30
  text "PA14" at 4286.85,3394.53 h30
  text "PA6" at 2686.85,3294.53 h30
  text "PA7" at 3256.85,3294.53 h30
  text "PA13" at 3726.85,3294.53 h30
  text "PA12" at 4286.85,3294.53 h30
  text "3.3V" at 5051.85,3279.53 h30 r90
  text "IO" at 5051.85,3209.53 h30 r90
  text "PB0" at 2686.85,3194.53 h30
  text "PB1" at 3256.85,3194.53 h30
  text "PA11" at 3726.85,3194.53 h30
  text "PA10" at 4286.85,3194.53 h30
  text "PB2" at 2686.85,3094.53 h30
  text "PB10" at 3256.85,3094.53 h30
  text "PA9" at 3726.85,3094.53 h30
  text "PA8" at 4286.85,3094.53 h30
  text "CLK" at 5051.85,3079.53 h30 r90
  text "PB15" at 3726.85,3004.53 h30
  text "PB11" at 2686.85,2994.53 h30
  text "GND" at 3256.85,2994.53 h30
  text "PB14" at 4286.85,2994.53 h30
  text "GND" at 5051.85,2979.53 h30 r90
  text "PB13" at 3726.85,2904.53 h30
  text "5V" at 2706.85,2894.53 h30
  text "3.3V" at 3256.85,2894.53 h30
  text "PB12" at 4286.85,2894.53 h30
  text "CLK" at 5051.85,2629.53 h30 r90
  text "CS" at 5051.85,2539.53 h30 r90
  text "CMD" at 5051.85,2429.53 h30 r90
  text "DAT" at 5051.85,2329.53 h30 r90
  text "VCC" at 5051.85,2229.53 h30 r90
  text "GND" at 5051.85,2129.53 h30 r90
  text "5V" at 4646.85,1674.53 h30
  text "GND" at 4726.85,1674.53 h30
  text "TX" at 4846.85,1674.53 h30
  text "RX" at 4946.85,1674.53 h30
  text "BALLBOT2.0" at 2816.85,1649.53 h250
Document:
  lines w0.1: 3504.18,3520.52 3506.18,3522.52

## Text inside footprints (layer, text, board x,y; h text height)
OLED1: Top Overlay "IIC-Connector" at 1996.85,2295.91 h47.24; Top Overlay "0.96'OLED" at 2039.45,2380.96 h47.24
U1: Top Overlay "-" at 1711.85,3034.53 h80; Top Overlay "+" at 1740.13,3472.81 h80 r135